# EAGLE board SparkFun_Robo_HAT-Panel (EAGLE 9.5.2), part 1 of 5
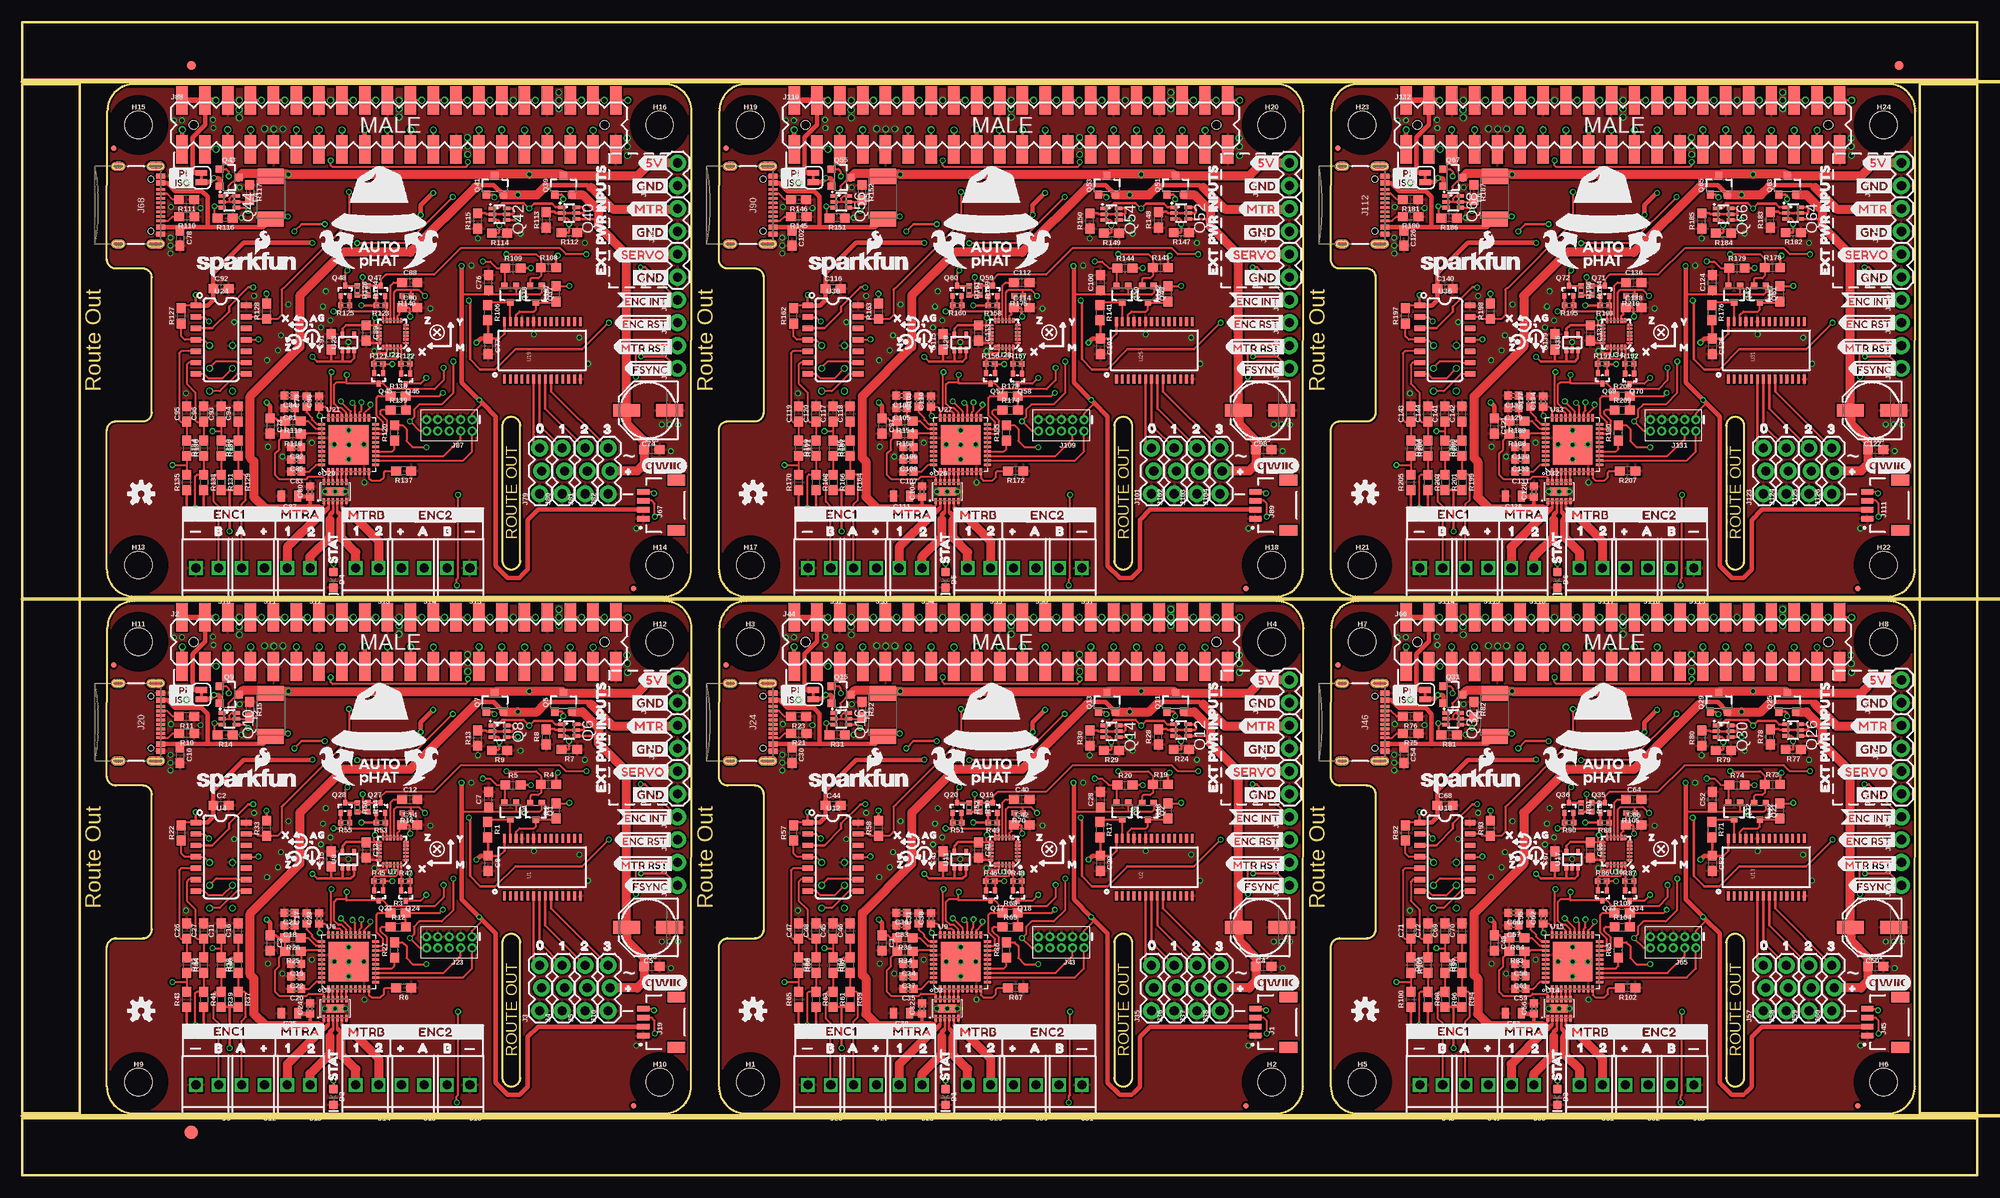
[diagram p0: board, top side]
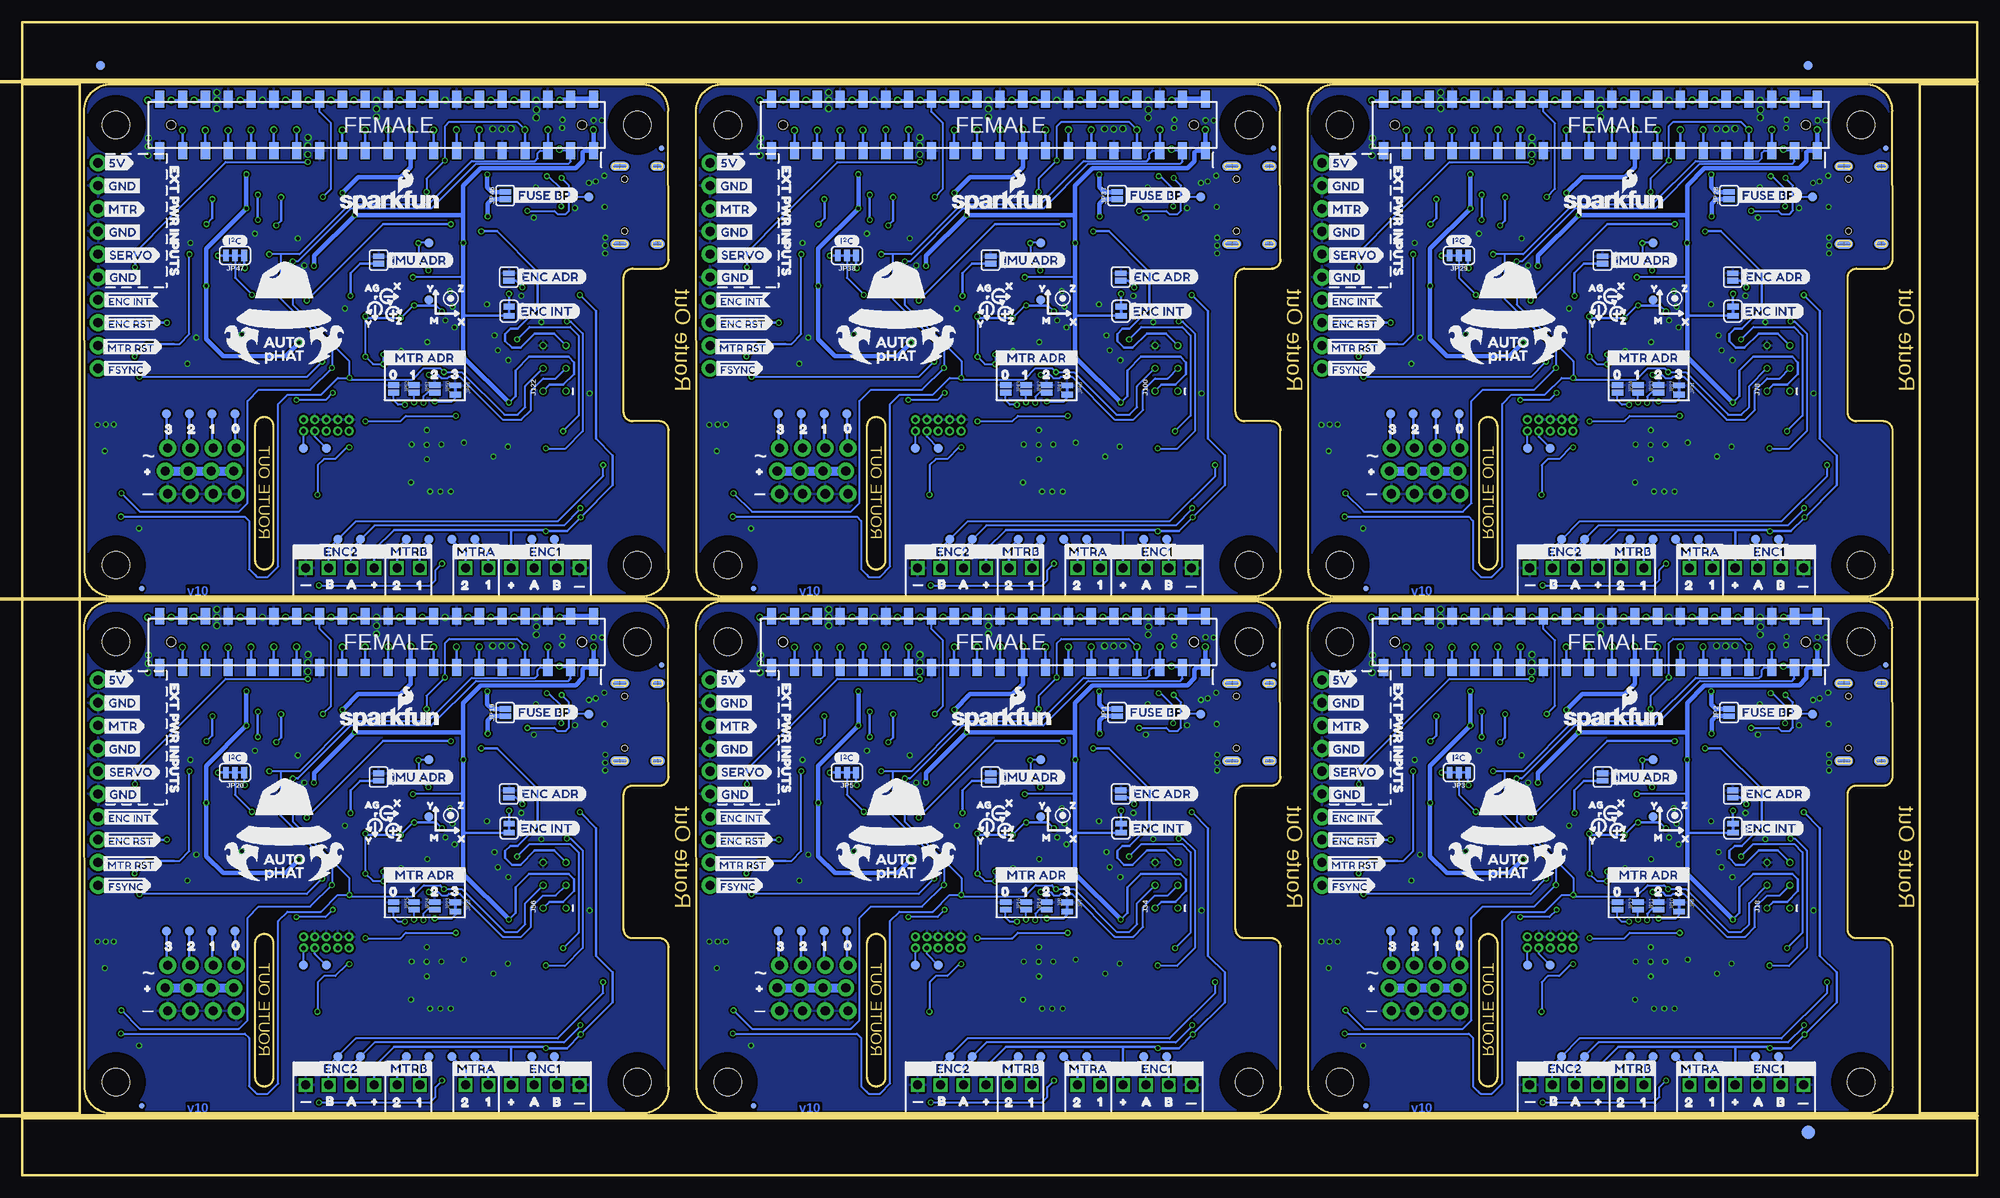
[diagram p1: board, bottom side, seen from below]

Size 217.51 x 128.29 mm. Coordinates in mm from the lower left corner, seen from the top.
Outline: 148 segments
Copper layers (1*16): Top 0.035mm / dielectric 1.5mm / Bottom 0.035mm
Design rules "SparkFun_Robo_HAT": minimum track width 4mil, minimum drill 6mil, track to track 4mil, track to pad 4mil, pad to pad 4mil, via to via 4mil, smd to smd 4mil, copper to edge 4mil, drill to drill 4mil, minimum pad ring 5mil, minimum via ring 5mil, stop-mask expansion 4mil, vias tented up to drill 25mil, thermal gap 10mil
Net classes: 1 power: width 0.508 mm
tRestrict: area 38.7,23.7 to 38.8,23.8; area 36.2,26.1 to 36.4,26.3; area 33.8,23.7 to 33.9,23.8; area 36.2,21.2 to 36.4,21.4; area 9.8,7.3 to 16,13.5; area 9.8,56.3 to 16,62.5; area 67.8,7.3 to 74,13.5; area 67.8,56.3 to 74,62.5; area 106.8,23.7 to 106.9,23.8; area 104.3,26.1 to 104.5,26.3; area 101.9,23.7 to 102,23.8; area 104.3,21.2 to 104.5,21.4; 36 more areas
bRestrict: area 9.8,7.3 to 16,13.5; area 9.8,56.3 to 16,62.5; area 67.8,7.3 to 74,13.5; area 67.8,56.3 to 74,62.5; area 77.9,7.3 to 84.1,13.5; area 77.9,56.3 to 84.1,62.5; area 135.9,7.3 to 142.1,13.5; area 135.9,56.3 to 142.1,62.5; area 146,7.3 to 152.2,13.5; area 146,56.3 to 152.2,62.5; area 204,7.3 to 210.2,13.5; area 204,56.3 to 210.2,62.5; 12 more areas
Milling: 3 lines

## Footprints (pad centres in the part's own frame; a part is rotated, then mirrored left to right if it is on the bottom)
0603 = smd 1.1 x 1: 1 -0.85,0; 2 0.85,0
PANASONIC_D = smd 3 x 1.4: + 2.4,0; - -2.4,0
0402 = smd 0.85 x 0.9: 1 -0.58,0; 2 0.58,0
0805 = smd 0.8 x 1.2: 1 -0.9,0; 2 0.9,0
LED-0603@1 = smd 1 x 1: A -0.877,0; C 0.877,0
FIDUCIAL-1X2 = smd 1 x 1: 1 0,0
FIDUCIAL-1.5X3 = smd 1.5 x 1.5: 1 0,0
1812 = smd 1.676 x 2.896: 1 -2.388,0; 2 2.388,0
FIDUCIAL-MICRO = smd 0.635 x 0.635: 1 0,0
STAND-OFF-TIGHT = hole 3.048: 0,0
SMT-JUMPER_2_NC_TRACE_SILK = smd 0.635 x 1.27: 1 -0.508,0; 2 0.508,0
JST04_1MM_RA = smd 0.6 x 1.35: 1 -1.5,0; 2 -0.5,0; 3 0.5,0; 4 1.5,0 | smd 1.2 x 2: NC1 2.8,-3.675; NC2 -2.8,-3.675
RASPBERRY_PI_HAT_40_PIN_SMD_STACKABLE_NOHOLES = smd 1.27 x 3.175: 1 0,-1.46; 2 0,4; 3 2.54,-1.46; 4 2.54,4; 5 5.08,-1.46; 6 5.08,4; 7 7.62,-1.46; 8 7.62,4; 9 10.16,-1.46; 10 10.16,4; 11 12.7,-1.46; 12 12.7,4; 13 15.24,-1.46; 14 15.24,4; 15 17.78,-1.46; 16 17.78,4; 17 20.32,-1.46; 18 20.32,4; 19 22.86,-1.46; 20 22.86,4; 21 25.4,-1.46; 22 25.4,4; 23 27.94,-1.46; 24 27.94,4; 25 30.48,-1.46; 26 30.48,4; 27 33.02,-1.46; 28 33.02,4; 29 35.56,-1.46; 30 35.56,4; 31 38.1,-1.46; 32 38.1,4; 33 40.64,-1.46; 34 40.64,4; 35 43.18,-1.46; 36 43.18,4; 37 45.72,-1.46; 38 45.72,4; 39 48.26,-1.46; 40 48.26,4 | smd 1.02 x 1.87 bottom: 1B 0,-1.587; 2B 0,4.128; 3B 2.54,-1.587; 4B 2.54,4.128; 5B 5.08,-1.587; 6B 5.08,4.128; 7B 7.62,-1.587; 8B 7.62,4.128; 9B 10.16,-1.587; 10B 10.16,4.128; 11B 12.7,-1.587; 12B 12.7,4.128; 13B 15.24,-1.587; 14B 15.24,4.128; 15B 17.78,-1.587; 16B 17.78,4.128; 17B 20.32,-1.587; 18B 20.32,4.128; 19B 22.86,-1.587; 20B 22.86,4.128; 21B 25.4,-1.587; 22B 25.4,4.128; 23B 27.94,-1.587; 24B 27.94,4.128; 25B 30.48,-1.587; 26B 30.48,4.128; 27B 33.02,-1.587; 28B 33.02,4.128; 29B 35.56,-1.587; 30B 35.56,4.128; 31B 38.1,-1.587; 32B 38.1,4.128; 33B 40.64,-1.587; 34B 40.64,4.128; 35B 43.18,-1.587; 36B 43.18,4.128; 37B 45.72,-1.587; 38B 45.72,4.128; 39B 48.26,-1.587; 40B 48.26,4.128 | hole 1: 1.27,1.27; 46.99,1.27
1X03_LOCK = drill 1.016 pad 1.88: 1 0,0.127; 2 2.54,-0.127; 3 5.08,0.127
1X01_NO_SILK = drill 1.016 pad 1.88: 1 0,0
1X02 = drill 1.016 pad 1.88: 1 0,0; 2 2.54,0
1X02_2.54_SCREWTERM = drill 1.016 square: P1 2.54,0; P2 0,0
2X3_TEST_POINTS = drill 0.508: 1 -2.54,-1.27; 2 -2.54,1.27; 3 0,-1.27; 4 0,1.27; 5 2.54,-1.27; 6 2.54,1.27
USB-C-16P = smd 0.3 x 1: A5 -1.25,-0.34; A6 -0.25,-0.34; A7 0.25,-0.34; A8 1.25,-0.34; B5 1.75,-0.34; B6 0.75,-0.34; B7 -0.75,-0.34; B8 -1.75,-0.34 | smd 0.6 x 1: GND -3.225,-0.34; GND2 3.225,-0.34; VBUS1 -2.45,-0.34; VBUS2 2.45,-0.34 | smd 1 x 2.1: SHLD1 -4.32,-0.915; SHLD2 4.32,-0.915 | smd 1 x 2.1 bottom: SHLD3 -4.32,-0.915; SHLD4 4.32,-0.915 | smd 1 x 1.6: SHLD5 -4.32,-5.095; SHLD8 4.32,-5.095 | smd 1 x 1.6 bottom: SHLD6 -4.32,-5.095; SHLD7 4.32,-5.095 | hole 0.65: -2.89,-1.445; 2.89,-1.445
2X5-PTH-1.27MM = drill 0.508 pad 1: 1 -2.54,-0.635; 2 -2.54,0.635; 3 -1.27,-0.635; 4 -1.27,0.635; 5 0,-0.635; 6 0,0.635; 7 1.27,-0.635; 8 1.27,0.635; 9 2.54,-0.635; 10 2.54,0.635
SMT-JUMPER_2_NO_SILK = smd 0.635 x 1.27: 1 -0.406,0; 2 0.406,0
SMT-JUMPER_3_2-NC_TRACE_SILK = smd 0.635 x 1.27: 1 -1.016,0; 2 0,0; 3 1.016,0
SMT-JUMPER_2_NC_TRACE_NO-SILK = smd 0.635 x 1.27: 1 -0.508,0; 2 0.508,0
SMT-JUMPER_2_NO_NO-SILK = smd 0.635 x 1.27: 1 -0.406,0; 2 0.406,0
SOT323 = smd 0.7 x 0.7: 1 -0.65,-0.925; 2 0.65,-0.925; 3 0,0.925
SOT23-3 = smd 0.8 x 0.9: 1 -0.95,-1; 2 0.95,-1; 3 0,1.1
SOT363_PHILIPS = smd 0.4 x 0.8: 1 -0.65,-0.8; 2 0,-0.8; 3 0.65,-0.8; 4 0.65,0.8; 5 0,0.8; 6 -0.65,0.8
SOT-416FL = smd 0.46 x 0.65: 1 -0.5,-1.1; 2 0.5,-1.1; 3 0,0.05
0603@1 = smd 1.1 x 1: 1 -0.85,0; 2 0.85,0
0402-TIGHT = smd 0.6 x 0.6: 1 -0.5,0; 2 0.5,0
PAD.03X.04 = smd 1.016 x 1.016: P$1 0,0
TP_15TH = drill 0.381 pad 0.61: P$1 0,0
TSSOP-28_4MM = smd 1 x 0.3: 1 -3.2,4.225; 2 -3.2,3.575; 3 -3.2,2.925; 4 -3.2,2.275; 5 -3.2,1.625; 6 -3.2,0.975; 7 -3.2,0.325; 8 -3.2,-0.325; 9 -3.2,-0.975; 10 -3.2,-1.625; 11 -3.2,-2.275; 12 -3.2,-2.925; 13 -3.2,-3.575; 14 -3.2,-4.225; 15 3.2,-4.225; 16 3.2,-3.575; 17 3.2,-2.925; 18 3.2,-2.275; 19 3.2,-1.625; 20 3.2,-0.975; 21 3.2,-0.325; 22 3.2,0.325; 23 3.2,0.975; 24 3.2,1.625; 25 3.2,2.275; 26 3.2,2.925; 27 3.2,3.575; 28 3.2,4.225
WSON-12 = smd 0.3 x 0.7: 1 -1.25,-1.05; 2 -0.75,-1.05; 3 -0.25,-1.05; 4 0.25,-1.05; 5 0.75,-1.05; 6 1.25,-1.05; 7 1.25,1.05; 8 0.75,1.05; 9 0.25,1.05; 10 -0.25,1.05; 11 -0.75,1.05; 12 -1.25,1.05 | smd 2 x 0.9: PAD 0,0
SO14 = smd 0.6 x 1.2: 1 -3.175,-2.8; 2 -1.905,-2.8; 3 -0.635,-2.8; 4 0.635,-2.8; 5 1.905,-2.8; 6 3.175,-2.8; 7 4.445,-2.8; 8 4.445,2.8; 9 3.175,2.8; 10 1.905,2.8; 11 0.635,2.8; 12 -0.635,2.8; 13 -1.905,2.8; 14 -3.175,2.8
QFN-40 = smd 0.285 x 0.8: 1 -2.25,-3; 2 -1.75,-3; 3 -1.25,-3; 4 -0.75,-3; 5 -0.25,-3; 6 0.25,-3; 7 0.75,-3; 8 1.25,-3; 9 1.75,-3; 10 2.25,-3; 21 2.25,3; 22 1.75,3; 23 1.25,3; 24 0.75,3; 25 0.25,3; 26 -0.25,3; 27 -0.75,3; 28 -1.25,3; 29 -1.75,3; 30 -2.25,3 | smd 0.8 x 0.285: 11 3,-2.25; 12 3,-1.75; 13 3,-1.25; 14 3,-0.75; 15 3,-0.25; 16 3,0.25; 17 3,0.75; 18 3,1.25; 19 3,1.75; 20 3,2.25; 31 -3,2.25; 32 -3,1.75; 33 -3,1.25; 34 -3,0.75; 35 -3,0.25; 36 -3,-0.25; 37 -3,-0.75; 38 -3,-1.25; 39 -3,-1.75; 40 -3,-2.25 | smd 4.4 x 4.4: EP 0,0
QFN24-3X3 = smd 0.495 x 0.25: 1 -1.552,1; 6 -1.552,-1; 13 1.552,-1; 18 1.552,1 | smd 0.6 x 0.25: 2 -1.5,0.6; 3 -1.5,0.2; 4 -1.5,-0.2; 5 -1.5,-0.6; 14 1.5,-0.6; 15 1.5,-0.2; 16 1.5,0.2; 17 1.5,0.6 | smd 0.25 x 0.495: 7 -1,-1.552; 12 1,-1.552; 19 1,1.552; 24 -1,1.552 | smd 0.25 x 0.6: 8 -0.6,-1.5; 9 -0.2,-1.5; 10 0.2,-1.5; 11 0.6,-1.5; 20 0.6,1.5; 21 0.2,1.5; 22 -0.2,1.5; 23 -0.6,1.5
SC70 = smd 0.4 x 0.75: 1 -0.65,-0.825; 2 0,-0.825; 3 0.65,-0.825; 4 0.65,0.825; 5 -0.65,0.825

## Placement (x,y rotation side)
C1  0.1uF  [0603]  95.67,25.84 270 top
C2  0.1uF  [0603]  22.1,41.15 0 top
C3  0.1uF  [0603]  27.57,25.84 270 top
C4  100uF  [PANASONIC_D]  137.73,27.58 180 top
C5  100uF  [PANASONIC_D]  69.63,27.58 180 top
C6  0.1uF  [0603]  70.03,23.23 0 top
C7  0.1uF  [0603]  51.86,41.78 90 top
C8  0.1uF  [0603]  51.84,34.7 270 top
C9  0.1uF  [0603]  138.13,23.23 0 top
C10  0.1uF  [0603]  17.53,46.74 270 top
C11  10nF  [0603]  22.1,27.18 90 top
C12  0.1uF  [0603]  43.1,41.82 0 top
C13  0.1uF  [0603]  38.27,36.19 270 top
C14  1.0uF  [0603]  43.09,39 0 top
C15  1.0uF  [0603]  34.34,35.19 90 top
C16  10nF  [0603]  24,27.18 90 top
C17  1.0uF  [0402]  31.62,28.57 90 top
C18  1.0uF  [0402]  29.72,27.81 180 top
C19  1.0uF  [0402]  30.48,23.5 180 top
C20  1.0uF  [0402]  30.48,20.75 180 top
C21  0.1uF  [0402]  29.72,29.21 180 top
C22  0.1uF  [0402]  30.48,22.12 180 top
C23  0.1uF  [0402]  33.02,28.57 90 top
C24  0.1uF  [0402]  32,18.54 90 top
C25  10uF  [0805]  29.72,18.03 180 top
C26  10nF  [0603]  18.29,27.18 90 top
C27  10nF  [0603]  20.19,27.18 90 top
C28  0.1uF  [0603]  119.96,41.78 90 top
C29  0.1uF  [0603]  119.94,34.7 270 top
C30  0.1uF  [0603]  85.63,46.74 270 top
C31  1.0uF  [0402]  99.72,28.57 90 top
C32  0.1uF  [0402]  100.1,18.54 90 top
C33  1.0uF  [0402]  97.82,27.81 180 top
C34  1.0uF  [0402]  98.58,23.5 180 top
C35  1.0uF  [0402]  98.58,20.75 180 top
C36  0.1uF  [0402]  97.82,29.21 180 top
C37  0.1uF  [0402]  98.58,22.12 180 top
C38  0.1uF  [0402]  101.12,28.57 90 top
C39  10uF  [0805]  97.82,18.03 180 top
C40  0.1uF  [0603]  111.2,41.82 0 top
C41  0.1uF  [0603]  106.37,36.19 270 top
C42  1.0uF  [0603]  111.19,39 0 top
C43  1.0uF  [0603]  102.44,35.19 90 top
C44  0.1uF  [0603]  90.2,41.15 0 top
C45  10nF  [0603]  90.2,27.18 90 top
C46  10nF  [0603]  92.1,27.18 90 top
C47  10nF  [0603]  86.39,27.18 90 top
C48  10nF  [0603]  88.29,27.18 90 top
C49  0.1uF  [0603]  163.77,25.84 270 top
C50  100uF  [PANASONIC_D]  205.82,27.58 180 top
C51  0.1uF  [0603]  206.23,23.23 0 top
C52  0.1uF  [0603]  188.06,41.78 90 top
C53  0.1uF  [0603]  188.04,34.7 270 top
C54  0.1uF  [0603]  153.72,46.74 270 top
C55  1.0uF  [0402]  167.82,28.57 90 top
C56  0.1uF  [0402]  168.2,18.54 90 top
C57  1.0uF  [0402]  165.92,27.81 180 top
C58  1.0uF  [0402]  166.68,23.5 180 top
C59  1.0uF  [0402]  166.68,20.75 180 top
C60  0.1uF  [0402]  165.92,29.21 180 top
C61  0.1uF  [0402]  166.68,22.12 180 top
C62  0.1uF  [0402]  169.22,28.57 90 top
C63  10uF  [0805]  165.92,18.03 180 top
C64  0.1uF  [0603]  179.3,41.82 0 top
C65  0.1uF  [0603]  174.46,36.19 270 top
C66  1.0uF  [0603]  179.29,39 0 top
C67  1.0uF  [0603]  170.54,35.19 90 top
C68  0.1uF  [0603]  158.3,41.15 0 top
C69  10nF  [0603]  158.3,27.18 90 top
C70  10nF  [0603]  160.2,27.18 90 top
C71  10nF  [0603]  154.49,27.18 90 top
C72  10nF  [0603]  156.39,27.18 90 top
C73  0.1uF  [0603]  27.57,83.38 270 top
C74  100uF  [PANASONIC_D]  69.63,85.12 180 top
C75  0.1uF  [0603]  70.03,80.77 0 top
C76  0.1uF  [0603]  51.86,99.32 90 top
C77  0.1uF  [0603]  51.84,92.25 270 top
C78  0.1uF  [0603]  17.53,104.28 270 top
C79  1.0uF  [0402]  31.62,86.12 90 top
C80  0.1uF  [0402]  32,76.08 90 top
C81  1.0uF  [0402]  29.72,85.35 180 top
C82  1.0uF  [0402]  30.48,81.04 180 top
C83  1.0uF  [0402]  30.48,78.29 180 top
C84  0.1uF  [0402]  29.72,86.75 180 top
C85  0.1uF  [0402]  30.48,79.66 180 top
C86  0.1uF  [0402]  33.02,86.12 90 top
C87  10uF  [0805]  29.72,75.58 180 top
C88  0.1uF  [0603]  43.1,99.36 0 top
C89  0.1uF  [0603]  38.27,93.73 270 top
C90  1.0uF  [0603]  43.09,96.54 0 top
C91  1.0uF  [0603]  34.34,92.74 90 top
C92  0.1uF  [0603]  22.1,98.69 0 top
C93  10nF  [0603]  22.1,84.72 90 top
C94  10nF  [0603]  24,84.72 90 top
C95  10nF  [0603]  18.29,84.72 90 top
C96  10nF  [0603]  20.19,84.72 90 top
C97  0.1uF  [0603]  95.67,83.38 270 top
C98  100uF  [PANASONIC_D]  137.73,85.12 180 top
C99  0.1uF  [0603]  138.13,80.77 0 top
C100  0.1uF  [0603]  119.96,99.32 90 top
C101  0.1uF  [0603]  119.94,92.25 270 top
C102  0.1uF  [0603]  85.63,104.28 270 top
C103  1.0uF  [0402]  99.72,86.12 90 top
C104  0.1uF  [0402]  100.1,76.08 90 top
C105  1.0uF  [0402]  97.82,85.35 180 top
C106  1.0uF  [0402]  98.58,81.04 180 top
C107  1.0uF  [0402]  98.58,78.29 180 top
C108  0.1uF  [0402]  97.82,86.75 180 top
C109  0.1uF  [0402]  98.58,79.66 180 top
C110  0.1uF  [0402]  101.12,86.12 90 top
C111  10uF  [0805]  97.82,75.58 180 top
C112  0.1uF  [0603]  111.2,99.36 0 top
C113  0.1uF  [0603]  106.37,93.73 270 top
C114  1.0uF  [0603]  111.19,96.54 0 top
C115  1.0uF  [0603]  102.44,92.74 90 top
C116  0.1uF  [0603]  90.2,98.69 0 top
C117  10nF  [0603]  90.2,84.72 90 top
C118  10nF  [0603]  92.1,84.72 90 top
C119  10nF  [0603]  86.39,84.72 90 top
C120  10nF  [0603]  88.29,84.72 90 top
C121  0.1uF  [0603]  163.77,83.38 270 top
C122  100uF  [PANASONIC_D]  205.82,85.12 180 top
C123  0.1uF  [0603]  206.23,80.77 0 top
C124  0.1uF  [0603]  188.06,99.32 90 top
C125  0.1uF  [0603]  188.04,92.25 270 top
C126  0.1uF  [0603]  153.72,104.28 270 top
C127  1.0uF  [0402]  167.82,86.12 90 top
C128  0.1uF  [0402]  168.2,76.08 90 top
C129  1.0uF  [0402]  165.92,85.35 180 top
C130  1.0uF  [0402]  166.68,81.04 180 top
C131  1.0uF  [0402]  166.68,78.29 180 top
C132  0.1uF  [0402]  165.92,86.75 180 top
C133  0.1uF  [0402]  166.68,79.66 180 top
C134  0.1uF  [0402]  169.22,86.12 90 top
C135  10uF  [0805]  165.92,75.58 180 top
C136  0.1uF  [0603]  179.3,99.36 0 top
C137  0.1uF  [0603]  174.46,93.73 270 top
C138  1.0uF  [0603]  179.29,96.54 0 top
C139  1.0uF  [0603]  170.54,92.74 90 top
C140  0.1uF  [0603]  158.3,98.69 0 top
C141  10nF  [0603]  158.3,84.72 90 top
C142  10nF  [0603]  160.2,84.72 90 top
C143  10nF  [0603]  154.49,84.72 90 top
C144  10nF  [0603]  156.39,84.72 90 top
D1  BLUE  [LED-0603@1]  102.72,8.71 270 top
D2  BLUE  [LED-0603@1]  34.62,8.71 270 top
D3  BLUE  [LED-0603@1]  170.81,8.71 270 top
D4  BLUE  [LED-0603@1]  34.62,66.25 270 top
D5  BLUE  [LED-0603@1]  102.72,66.25 270 top
D6  BLUE  [LED-0603@1]  170.81,66.25 270 top
E$1  [FIDUCIAL-1X2]  18.8,123.53 0 top
E$2  [FIDUCIAL-1X2]  18.8,123.53 0 bottom
E$3  [FIDUCIAL-1X2]  208.81,123.53 0 top
E$4  [FIDUCIAL-1X2]  208.81,123.53 0 bottom
E$5  [FIDUCIAL-1.5X3]  18.8,4.76 0 top
E$6  [FIDUCIAL-1.5X3]  18.8,4.76 0 bottom
F1  16V/2.5A(5A TRIP)  [1812]  95.74,51.22 90 top
F2  16V/2.5A(5A TRIP)  [1812]  27.64,51.22 90 top
F3  16V/2.5A(5A TRIP)  [1812]  163.84,51.22 90 top
F4  16V/2.5A(5A TRIP)  [1812]  27.64,108.77 90 top
F5  16V/2.5A(5A TRIP)  [1812]  95.74,108.77 90 top
F6  16V/2.5A(5A TRIP)  [1812]  163.84,108.77 90 top
FD1  FIDUCIALUFIDUCIAL  [FIDUCIAL-MICRO]  136.13,7.74 0 top
FD2  FIDUCIALUFIDUCIAL  [FIDUCIAL-MICRO]  136.13,7.74 0 bottom
FD3  FIDUCIALUFIDUCIAL  [FIDUCIAL-MICRO]  78.27,56.77 0 top
FD4  FIDUCIALUFIDUCIAL  [FIDUCIAL-MICRO]  78.27,56.77 0 bottom
FD5  FIDUCIALUFIDUCIAL  [FIDUCIAL-MICRO]  68.03,7.74 0 top
FD6  FIDUCIALUFIDUCIAL  [FIDUCIAL-MICRO]  68.03,7.74 0 bottom
FD7  FIDUCIALUFIDUCIAL  [FIDUCIAL-MICRO]  10.17,56.77 0 top
FD8  FIDUCIALUFIDUCIAL  [FIDUCIAL-MICRO]  10.17,56.77 0 bottom
FD9  FIDUCIALUFIDUCIAL  [FIDUCIAL-MICRO]  204.23,7.74 0 top
FD10  FIDUCIALUFIDUCIAL  [FIDUCIAL-MICRO]  204.23,7.74 0 bottom
FD11  FIDUCIALUFIDUCIAL  [FIDUCIAL-MICRO]  146.37,56.77 0 top
FD12  FIDUCIALUFIDUCIAL  [FIDUCIAL-MICRO]  146.37,56.77 0 bottom
FD13  FIDUCIALUFIDUCIAL  [FIDUCIAL-MICRO]  68.03,65.28 0 top
FD14  FIDUCIALUFIDUCIAL  [FIDUCIAL-MICRO]  68.03,65.28 0 bottom
FD15  FIDUCIALUFIDUCIAL  [FIDUCIAL-MICRO]  10.17,114.31 0 top
FD16  FIDUCIALUFIDUCIAL  [FIDUCIAL-MICRO]  10.17,114.31 0 bottom
FD17  FIDUCIALUFIDUCIAL  [FIDUCIAL-MICRO]  136.13,65.28 0 top
FD18  FIDUCIALUFIDUCIAL  [FIDUCIAL-MICRO]  136.13,65.28 0 bottom
FD19  FIDUCIALUFIDUCIAL  [FIDUCIAL-MICRO]  78.27,114.31 0 top
FD20  FIDUCIALUFIDUCIAL  [FIDUCIAL-MICRO]  78.27,114.31 0 bottom
FD21  FIDUCIALUFIDUCIAL  [FIDUCIAL-MICRO]  204.23,65.28 0 top
FD22  FIDUCIALUFIDUCIAL  [FIDUCIAL-MICRO]  204.23,65.28 0 bottom
FD23  FIDUCIALUFIDUCIAL  [FIDUCIAL-MICRO]  146.37,114.31 0 top
FD24  FIDUCIALUFIDUCIAL  [FIDUCIAL-MICRO]  146.37,114.31 0 bottom
FRAME1  FRAME-LETTERNO_PACKAGE  [DUMMY]  36.07,-13.46 0 top  (outside the outline)
FRAME2  FRAME-LEDGER  [CREATIVE_COMMONS]  33.53,-13.46 0 top  (outside the outline)
FRAME3  FRAME-LEDGER  [CREATIVE_COMMONS]  33.53,-13.46 0 top  (outside the outline)
FRAME4  FRAME-LEDGER  [CREATIVE_COMMONS]  101.63,-13.46 0 top  (outside the outline)
FRAME5  FRAME-LETTERNO_PACKAGE  [DUMMY]  104.17,-13.46 0 top  (outside the outline)
FRAME6  FRAME-LEDGER  [CREATIVE_COMMONS]  101.63,-13.46 0 top  (outside the outline)
FRAME7  FRAME-LEDGER  [CREATIVE_COMMONS]  169.73,-13.46 0 top  (outside the outline)
FRAME8  FRAME-LETTERNO_PACKAGE  [DUMMY]  172.27,-13.46 0 top  (outside the outline)
FRAME9  FRAME-LEDGER  [CREATIVE_COMMONS]  169.73,-13.46 0 top  (outside the outline)
FRAME10  FRAME-LEDGER  [CREATIVE_COMMONS]  33.53,44.08 0 top
FRAME11  FRAME-LETTERNO_PACKAGE  [DUMMY]  36.07,44.08 0 top
FRAME12  FRAME-LEDGER  [CREATIVE_COMMONS]  33.53,44.08 0 top
FRAME13  FRAME-LEDGER  [CREATIVE_COMMONS]  101.63,44.08 0 top
FRAME14  FRAME-LETTERNO_PACKAGE  [DUMMY]  104.17,44.08 0 top
FRAME15  FRAME-LEDGER  [CREATIVE_COMMONS]  101.63,44.08 0 top
FRAME16  FRAME-LEDGER  [CREATIVE_COMMONS]  169.73,44.08 0 top
FRAME17  FRAME-LETTERNO_PACKAGE  [DUMMY]  172.27,44.08 0 top
FRAME18  FRAME-LEDGER  [CREATIVE_COMMONS]  169.73,44.08 0 top
H1  STAND-OFFTIGHT  [STAND-OFF-TIGHT]  81,10.36 0 top
H2  STAND-OFFTIGHT  [STAND-OFF-TIGHT]  139,10.36 0 top
H3  STAND-OFFTIGHT  [STAND-OFF-TIGHT]  81,59.36 0 top
H4  STAND-OFFTIGHT  [STAND-OFF-TIGHT]  139,59.36 0 top
H5  STAND-OFFTIGHT  [STAND-OFF-TIGHT]  149.1,10.36 0 top
H6  STAND-OFFTIGHT  [STAND-OFF-TIGHT]  207.1,10.36 0 top
H7  STAND-OFFTIGHT  [STAND-OFF-TIGHT]  149.1,59.36 0 top
H8  STAND-OFFTIGHT  [STAND-OFF-TIGHT]  207.1,59.36 0 top
H9  STAND-OFFTIGHT  [STAND-OFF-TIGHT]  12.9,10.36 0 top
H10  STAND-OFFTIGHT  [STAND-OFF-TIGHT]  70.9,10.36 0 top
H11  STAND-OFFTIGHT  [STAND-OFF-TIGHT]  12.9,59.36 0 top
H12  STAND-OFFTIGHT  [STAND-OFF-TIGHT]  70.9,59.36 0 top
H13  STAND-OFFTIGHT  [STAND-OFF-TIGHT]  12.9,67.9 0 top
H14  STAND-OFFTIGHT  [STAND-OFF-TIGHT]  70.9,67.9 0 top
H15  STAND-OFFTIGHT  [STAND-OFF-TIGHT]  12.9,116.9 0 top
H16  STAND-OFFTIGHT  [STAND-OFF-TIGHT]  70.9,116.9 0 top
H17  STAND-OFFTIGHT  [STAND-OFF-TIGHT]  81,67.9 0 top
H18  STAND-OFFTIGHT  [STAND-OFF-TIGHT]  139,67.9 0 top
H19  STAND-OFFTIGHT  [STAND-OFF-TIGHT]  81,116.9 0 top
H20  STAND-OFFTIGHT  [STAND-OFF-TIGHT]  139,116.9 0 top
H21  STAND-OFFTIGHT  [STAND-OFF-TIGHT]  149.1,67.9 0 top
H22  STAND-OFFTIGHT  [STAND-OFF-TIGHT]  207.1,67.9 0 top
H23  STAND-OFFTIGHT  [STAND-OFF-TIGHT]  149.1,116.9 0 top
H24  STAND-OFFTIGHT  [STAND-OFF-TIGHT]  207.1,116.9 0 top
INT  [SMT-JUMPER_2_NC_TRACE_SILK]  27.15,38.61 270 bottom
INT1  [SMT-JUMPER_2_NC_TRACE_SILK]  95.25,38.61 270 bottom
INT2  [SMT-JUMPER_2_NC_TRACE_SILK]  163.35,38.61 270 bottom
INT3  [SMT-JUMPER_2_NC_TRACE_SILK]  27.15,96.15 270 bottom
INT4  [SMT-JUMPER_2_NC_TRACE_SILK]  95.25,96.15 270 bottom
INT5  [SMT-JUMPER_2_NC_TRACE_SILK]  163.35,96.15 270 bottom
J1  [JST04_1MM_RA]  137.19,17.02 90 top
J2  RASPBERRYPI-40-PIN-GPIO_SMD_STACKABLE_NOHOLES  [RASPBERRY_PI_HAT_40_PIN_SMD_STACKABLE_NOHOLES]  17.77,58.07 0 top
J3  [1X03_LOCK]  57.66,18.29 90 top
J4  [1X03_LOCK]  60.2,18.29 90 top
J5  [1X03_LOCK]  62.74,18.29 90 top
J6  [1X01_NO_SILK]  72.9,39.88 90 top
J7  EXT SERVO PWR  [1X02]  72.9,42.42 90 top
J8  EXT 5V PWR  [1X02]  72.9,52.58 90 top
J9  [1X02_2.54_SCREWTERM]  21.84,10.03 180 top
J10  [1X03_LOCK]  65.28,18.29 90 top
J11  EXT MTR PWR  [1X02]  72.9,47.5 90 top
J12  [1X02_2.54_SCREWTERM]  26.92,10.03 180 top
J13  [1X02_2.54_SCREWTERM]  32,10.03 180 top
J14  [1X02_2.54_SCREWTERM]  39.62,10.03 180 top
J15  [1X02_2.54_SCREWTERM]  44.7,10.03 180 top
J16  [1X02_2.54_SCREWTERM]  49.78,10.03 180 top
J17  [1X01_NO_SILK]  72.9,37.34 90 top
J18  ISP  [2X3_TEST_POINTS]  22.1,32.26 90 bottom
J19  [JST04_1MM_RA]  69.09,17.02 90 top
J20  USB C  [USB-C-16P]  15.75,50.42 270 top
J21  [1X01_NO_SILK]  72.9,32.26 90 top
J22  [1X01_NO_SILK]  72.9,34.8 90 top
J23  CORTEX_JTAG_DEBUG_PTH  [2X5-PTH-1.27MM]  47.5,25.91 180 top
J24  USB C  [USB-C-16P]  83.85,50.42 270 top
J25  EXT MTR PWR  [1X02]  141,47.5 90 top
J26  [1X02_2.54_SCREWTERM]  89.94,10.03 180 top
J27  [1X02_2.54_SCREWTERM]  95.02,10.03 180 top
J28  [1X02_2.54_SCREWTERM]  100.1,10.03 180 top
J29  [1X02_2.54_SCREWTERM]  107.72,10.03 180 top
J30  [1X02_2.54_SCREWTERM]  112.8,10.03 180 top
J31  [1X02_2.54_SCREWTERM]  117.88,10.03 180 top
J32  [1X01_NO_SILK]  141,39.88 90 top
J33  [1X01_NO_SILK]  141,37.34 90 top
J34  ISP  [2X3_TEST_POINTS]  90.2,32.26 90 bottom
J35  [1X03_LOCK]  125.76,18.29 90 top
J36  [1X03_LOCK]  128.3,18.29 90 top
J37  [1X03_LOCK]  130.84,18.29 90 top
J38  [1X03_LOCK]  133.38,18.29 90 top
J39  EXT SERVO PWR  [1X02]  141,42.42 90 top
J40  EXT 5V PWR  [1X02]  141,52.58 90 top
J41  [1X01_NO_SILK]  141,32.26 90 top
J42  [1X01_NO_SILK]  141,34.8 90 top
J43  CORTEX_JTAG_DEBUG_PTH  [2X5-PTH-1.27MM]  115.6,25.91 180 top
J44  RASPBERRYPI-40-PIN-GPIO_SMD_STACKABLE_NOHOLES  [RASPBERRY_PI_HAT_40_PIN_SMD_STACKABLE_NOHOLES]  85.87,58.07 0 top
J45  [JST04_1MM_RA]  205.29,17.02 90 top
J46  USB C  [USB-C-16P]  151.95,50.42 270 top
J47  EXT MTR PWR  [1X02]  209.1,47.5 90 top
J48  [1X02_2.54_SCREWTERM]  158.04,10.03 180 top
J49  [1X02_2.54_SCREWTERM]  163.12,10.03 180 top
J50  [1X02_2.54_SCREWTERM]  168.2,10.03 180 top
J51  [1X02_2.54_SCREWTERM]  175.82,10.03 180 top
J52  [1X02_2.54_SCREWTERM]  180.9,10.03 180 top
J53  [1X02_2.54_SCREWTERM]  185.98,10.03 180 top
J54  [1X01_NO_SILK]  209.1,39.88 90 top
J55  [1X01_NO_SILK]  209.1,37.34 90 top
J56  ISP  [2X3_TEST_POINTS]  158.3,32.26 90 bottom
J57  [1X03_LOCK]  193.86,18.29 90 top
J58  [1X03_LOCK]  196.4,18.29 90 top
J59  [1X03_LOCK]  198.94,18.29 90 top
J60  [1X03_LOCK]  201.48,18.29 90 top
J61  EXT SERVO PWR  [1X02]  209.1,42.42 90 top
J62  EXT 5V PWR  [1X02]  209.1,52.58 90 top
J63  [1X01_NO_SILK]  209.1,32.26 90 top
J64  [1X01_NO_SILK]  209.1,34.8 90 top
J65  CORTEX_JTAG_DEBUG_PTH  [2X5-PTH-1.27MM]  183.7,25.91 180 top
J66  RASPBERRYPI-40-PIN-GPIO_SMD_STACKABLE_NOHOLES  [RASPBERRY_PI_HAT_40_PIN_SMD_STACKABLE_NOHOLES]  153.97,58.07 0 top
J67  [JST04_1MM_RA]  69.09,74.56 90 top
J68  USB C  [USB-C-16P]  15.75,107.96 270 top
J69  EXT MTR PWR  [1X02]  72.9,105.04 90 top
J70  [1X02_2.54_SCREWTERM]  21.84,67.57 180 top
J71  [1X02_2.54_SCREWTERM]  26.92,67.57 180 top
J72  [1X02_2.54_SCREWTERM]  32,67.57 180 top
J73  [1X02_2.54_SCREWTERM]  39.62,67.57 180 top
J74  [1X02_2.54_SCREWTERM]  44.7,67.57 180 top
J75  [1X02_2.54_SCREWTERM]  49.78,67.57 180 top
J76  [1X01_NO_SILK]  72.9,97.42 90 top
J77  [1X01_NO_SILK]  72.9,94.88 90 top
J78  ISP  [2X3_TEST_POINTS]  22.1,89.8 90 bottom
J79  [1X03_LOCK]  57.66,75.83 90 top
J80  [1X03_LOCK]  60.2,75.83 90 top
J81  [1X03_LOCK]  62.74,75.83 90 top
J82  [1X03_LOCK]  65.28,75.83 90 top
J83  EXT SERVO PWR  [1X02]  72.9,99.96 90 top
J84  EXT 5V PWR  [1X02]  72.9,110.12 90 top
J85  [1X01_NO_SILK]  72.9,89.8 90 top
J86  [1X01_NO_SILK]  72.9,92.34 90 top
J87  CORTEX_JTAG_DEBUG_PTH  [2X5-PTH-1.27MM]  47.5,83.45 180 top
J88  RASPBERRYPI-40-PIN-GPIO_SMD_STACKABLE_NOHOLES  [RASPBERRY_PI_HAT_40_PIN_SMD_STACKABLE_NOHOLES]  17.77,115.62 0 top
J89  [JST04_1MM_RA]  137.19,74.56 90 top
J90  USB C  [USB-C-16P]  83.85,107.96 270 top
J91  EXT MTR PWR  [1X02]  141,105.04 90 top
J92  [1X02_2.54_SCREWTERM]  89.94,67.57 180 top
J93  [1X02_2.54_SCREWTERM]  95.02,67.57 180 top
J94  [1X02_2.54_SCREWTERM]  100.1,67.57 180 top
J95  [1X02_2.54_SCREWTERM]  107.72,67.57 180 top
J96  [1X02_2.54_SCREWTERM]  112.8,67.57 180 top
J97  [1X02_2.54_SCREWTERM]  117.88,67.57 180 top
J98  [1X01_NO_SILK]  141,97.42 90 top
J99  [1X01_NO_SILK]  141,94.88 90 top
J100  ISP  [2X3_TEST_POINTS]  90.2,89.8 90 bottom
J101  [1X03_LOCK]  125.76,75.83 90 top
J102  [1X03_LOCK]  128.3,75.83 90 top
J103  [1X03_LOCK]  130.84,75.83 90 top
J104  [1X03_LOCK]  133.38,75.83 90 top
J105  EXT SERVO PWR  [1X02]  141,99.96 90 top
J106  EXT 5V PWR  [1X02]  141,110.12 90 top
J107  [1X01_NO_SILK]  141,89.8 90 top
J108  [1X01_NO_SILK]  141,92.34 90 top
J109  CORTEX_JTAG_DEBUG_PTH  [2X5-PTH-1.27MM]  115.6,83.45 180 top
J110  RASPBERRYPI-40-PIN-GPIO_SMD_STACKABLE_NOHOLES  [RASPBERRY_PI_HAT_40_PIN_SMD_STACKABLE_NOHOLES]  85.87,115.62 0 top
J111  [JST04_1MM_RA]  205.29,74.56 90 top
J112  USB C  [USB-C-16P]  151.95,107.96 270 top
J113  EXT MTR PWR  [1X02]  209.1,105.04 90 top
J114  [1X02_2.54_SCREWTERM]  158.04,67.57 180 top
J115  [1X02_2.54_SCREWTERM]  163.12,67.57 180 top
J116  [1X02_2.54_SCREWTERM]  168.2,67.57 180 top
J117  [1X02_2.54_SCREWTERM]  175.82,67.57 180 top
J118  [1X02_2.54_SCREWTERM]  180.9,67.57 180 top
J119  [1X02_2.54_SCREWTERM]  185.98,67.57 180 top
J120  [1X01_NO_SILK]  209.1,97.42 90 top
J121  [1X01_NO_SILK]  209.1,94.88 90 top
J122  ISP  [2X3_TEST_POINTS]  158.3,89.8 90 bottom
J123  [1X03_LOCK]  193.86,75.83 90 top
J124  [1X03_LOCK]  196.4,75.83 90 top
J125  [1X03_LOCK]  198.94,75.83 90 top
J126  [1X03_LOCK]  201.48,75.83 90 top
J127  EXT SERVO PWR  [1X02]  209.1,99.96 90 top
J128  EXT 5V PWR  [1X02]  209.1,110.12 90 top
J129  [1X01_NO_SILK]  209.1,89.8 90 top
J130  [1X01_NO_SILK]  209.1,92.34 90 top
J131  CORTEX_JTAG_DEBUG_PTH  [2X5-PTH-1.27MM]  183.7,83.45 180 top
J132  RASPBERRYPI-40-PIN-GPIO_SMD_STACKABLE_NOHOLES  [RASPBERRY_PI_HAT_40_PIN_SMD_STACKABLE_NOHOLES]  153.97,115.62 0 top
JP1  FUSE BP  [SMT-JUMPER_2_NO_SILK]  95.69,51.48 90 bottom
JP2  FUSE BP  [SMT-JUMPER_2_NO_SILK]  27.59,51.48 90 bottom
JP3  I2C  [SMT-JUMPER_3_2-NC_TRACE_SILK]  57.66,44.81 180 bottom
JP4  PI ISO  [SMT-JUMPER_2_NC_TRACE_SILK]  19.9,53.48 90 top
JP5  I2C  [SMT-JUMPER_3_2-NC_TRACE_SILK]  125.76,44.81 180 bottom
JP6  PI ISO  [SMT-JUMPER_2_NC_TRACE_SILK]  88,53.48 90 top
JP7  JUMPER-PAD-2  [SMT-JUMPER_2_NC_TRACE_NO-SILK]  101.25,29.84 270 bottom
JP8  JUMPER-PAD-2  [SMT-JUMPER_2_NO_NO-SILK]  103.53,29.97 270 bottom
JP9  JUMPER-PAD-2  [SMT-JUMPER_2_NC_TRACE_NO-SILK]  33.15,29.84 270 bottom
JP10  JUMPER-PAD-2  [SMT-JUMPER_2_NO_NO-SILK]  35.43,29.97 270 bottom
JP11  JUMPER-PAD-2  [SMT-JUMPER_2_NO_NO-SILK]  37.72,29.97 270 bottom
JP12  JUMPER-PAD-2  [SMT-JUMPER_2_NO_NO-SILK]  40,29.97 270 bottom
JP13  ADR  [SMT-JUMPER_2_NO_SILK]  27.18,42.42 270 bottom
JP14  JUMPER-PAD-2  [SMT-JUMPER_2_NO_NO-SILK]  105.82,29.97 270 bottom
JP15  ADR  [SMT-JUMPER_2_NO_SILK]  41.67,44.3 270 bottom
JP16  JUMPER-PAD-2  [SMT-JUMPER_2_NO_NO-SILK]  108.1,29.97 270 bottom
JP17  ADR  [SMT-JUMPER_2_NO_SILK]  109.77,44.3 270 bottom
JP18  ADR  [SMT-JUMPER_2_NO_SILK]  95.28,42.42 270 bottom
JP19  FUSE BP  [SMT-JUMPER_2_NO_SILK]  163.79,51.48 90 bottom
JP20  I2C  [SMT-JUMPER_3_2-NC_TRACE_SILK]  193.86,44.81 180 bottom
JP21  PI ISO  [SMT-JUMPER_2_NC_TRACE_SILK]  156.1,53.48 90 top
JP22  JUMPER-PAD-2  [SMT-JUMPER_2_NC_TRACE_NO-SILK]  169.34,29.84 270 bottom
JP23  JUMPER-PAD-2  [SMT-JUMPER_2_NO_NO-SILK]  171.63,29.97 270 bottom
JP24  JUMPER-PAD-2  [SMT-JUMPER_2_NO_NO-SILK]  173.92,29.97 270 bottom
JP25  JUMPER-PAD-2  [SMT-JUMPER_2_NO_NO-SILK]  176.2,29.97 270 bottom
JP26  ADR  [SMT-JUMPER_2_NO_SILK]  177.87,44.3 270 bottom
JP27  ADR  [SMT-JUMPER_2_NO_SILK]  163.38,42.42 270 bottom
JP28  FUSE BP  [SMT-JUMPER_2_NO_SILK]  27.59,109.02 90 bottom
JP29  I2C  [SMT-JUMPER_3_2-NC_TRACE_SILK]  57.66,102.35 180 bottom
JP30  PI ISO  [SMT-JUMPER_2_NC_TRACE_SILK]  19.9,111.03 90 top
JP31  JUMPER-PAD-2  [SMT-JUMPER_2_NC_TRACE_NO-SILK]  33.15,87.39 270 bottom
JP32  JUMPER-PAD-2  [SMT-JUMPER_2_NO_NO-SILK]  35.43,87.51 270 bottom
JP33  JUMPER-PAD-2  [SMT-JUMPER_2_NO_NO-SILK]  37.72,87.51 270 bottom
JP34  JUMPER-PAD-2  [SMT-JUMPER_2_NO_NO-SILK]  40,87.51 270 bottom
JP35  ADR  [SMT-JUMPER_2_NO_SILK]  41.67,101.84 270 bottom
JP36  ADR  [SMT-JUMPER_2_NO_SILK]  27.18,99.96 270 bottom
JP37  FUSE BP  [SMT-JUMPER_2_NO_SILK]  95.69,109.02 90 bottom
JP38  I2C  [SMT-JUMPER_3_2-NC_TRACE_SILK]  125.76,102.35 180 bottom
JP39  PI ISO  [SMT-JUMPER_2_NC_TRACE_SILK]  88,111.03 90 top
JP40  JUMPER-PAD-2  [SMT-JUMPER_2_NC_TRACE_NO-SILK]  101.25,87.39 270 bottom
JP41  JUMPER-PAD-2  [SMT-JUMPER_2_NO_NO-SILK]  103.53,87.51 270 bottom
JP42  JUMPER-PAD-2  [SMT-JUMPER_2_NO_NO-SILK]  105.82,87.51 270 bottom
JP43  JUMPER-PAD-2  [SMT-JUMPER_2_NO_NO-SILK]  108.1,87.51 270 bottom
JP44  ADR  [SMT-JUMPER_2_NO_SILK]  109.77,101.84 270 bottom
JP45  ADR  [SMT-JUMPER_2_NO_SILK]  95.28,99.96 270 bottom
JP46  FUSE BP  [SMT-JUMPER_2_NO_SILK]  163.79,109.02 90 bottom
JP47  I2C  [SMT-JUMPER_3_2-NC_TRACE_SILK]  193.86,102.35 180 bottom
JP48  PI ISO  [SMT-JUMPER_2_NC_TRACE_SILK]  156.1,111.03 90 top
JP49  JUMPER-PAD-2  [SMT-JUMPER_2_NC_TRACE_NO-SILK]  169.34,87.39 270 bottom
JP50  JUMPER-PAD-2  [SMT-JUMPER_2_NO_NO-SILK]  171.63,87.51 270 bottom
JP51  JUMPER-PAD-2  [SMT-JUMPER_2_NO_NO-SILK]  173.92,87.51 270 bottom
JP52  JUMPER-PAD-2  [SMT-JUMPER_2_NO_NO-SILK]  176.2,87.51 270 bottom
JP53  ADR  [SMT-JUMPER_2_NO_SILK]  177.87,101.84 270 bottom
JP54  ADR  [SMT-JUMPER_2_NO_SILK]  163.38,99.96 270 bottom
LOGO1  SFE_LOGO_NAME_FLAME.1_INCH  [SFE_LOGO_NAME_FLAME_.1]  40.39,50.67 0 bottom
LOGO2  OSHW-LOGOS  [OSHW-LOGO-S]  13.21,18.29 0 top
LOGO3  SFE_LOGO_NAME_FLAME.1_INCH  [SFE_LOGO_NAME_FLAME_.1]  108.49,50.67 0 bottom
LOGO4  SFE_LOGO_NAME_FLAME.1_INCH  [SFE_LOGO_NAME_FLAME_.1]  25,43.84 0 top
LOGO5  OSHW-LOGOS  [OSHW-LOGO-S]  81.31,18.29 0 top
LOGO6  SFE_LOGO_NAME_FLAME.1_INCH  [SFE_LOGO_NAME_FLAME_.1]  93.1,43.84 0 top
LOGO7  SFE_LOGO_NAME_FLAME.1_INCH  [SFE_LOGO_NAME_FLAME_.1]  176.58,50.67 0 bottom
LOGO8  OSHW-LOGOS  [OSHW-LOGO-S]  149.41,18.29 0 top
LOGO9  SFE_LOGO_NAME_FLAME.1_INCH  [SFE_LOGO_NAME_FLAME_.1]  161.2,43.84 0 top
LOGO10  SFE_LOGO_NAME_FLAME.1_INCH  [SFE_LOGO_NAME_FLAME_.1]  40.39,108.21 0 bottom
LOGO11  OSHW-LOGOS  [OSHW-LOGO-S]  13.21,75.83 0 top
LOGO12  SFE_LOGO_NAME_FLAME.1_INCH  [SFE_LOGO_NAME_FLAME_.1]  25,101.38 0 top
LOGO13  SFE_LOGO_NAME_FLAME.1_INCH  [SFE_LOGO_NAME_FLAME_.1]  108.49,108.21 0 bottom
LOGO14  OSHW-LOGOS  [OSHW-LOGO-S]  81.31,75.83 0 top
LOGO15  SFE_LOGO_NAME_FLAME.1_INCH  [SFE_LOGO_NAME_FLAME_.1]  93.1,101.38 0 top
LOGO16  SFE_LOGO_NAME_FLAME.1_INCH  [SFE_LOGO_NAME_FLAME_.1]  176.58,108.21 0 bottom
LOGO17  OSHW-LOGOS  [OSHW-LOGO-S]  149.41,75.83 0 top
LOGO18  SFE_LOGO_NAME_FLAME.1_INCH  [SFE_LOGO_NAME_FLAME_.1]  161.2,101.38 0 top
Q1  310mA/60V/1.6Ω  [SOT323]  57.14,40.5 180 top
Q2  310mA/60V/1.6Ω  [SOT323]  125.24,40.5 180 top
Q3  310mA/60V/1.6Ω  [SOT323]  122.38,40.52 180 top
Q4  310mA/60V/1.6Ω  [SOT323]  54.28,40.52 180 top
Q5  20V/4.2A/52mΩ/1.4W  [SOT23-3]  60.2,52.58 0 top
Q6  [SOT363_PHILIPS]  60.83,49.53 270 top
Q7  20V/4.2A/52mΩ/1.4W  [SOT23-3]  52.58,52.58 0 top
Q8  [SOT363_PHILIPS]  53.09,49.4 270 top
Q9  20V/4.2A/52mΩ/1.4W  [SOT23-3]  22.95,53.47 270 top
Q10  [SOT363_PHILIPS]  23.02,50.78 270 top
Q11  20V/4.2A/52mΩ/1.4W  [SOT23-3]  128.3,52.58 0 top
Q12  [SOT363_PHILIPS]  128.93,49.53 270 top
Q13  20V/4.2A/52mΩ/1.4W  [SOT23-3]  120.68,52.58 0 top
Q14  [SOT363_PHILIPS]  121.19,49.4 270 top
Q15  20V/4.2A/52mΩ/1.4W  [SOT23-3]  91.05,53.47 270 top
Q16  [SOT363_PHILIPS]  91.12,50.78 270 top
Q17  20V/0.2A/8MHz/1.2Ω/1Vth  [SOT-416FL]  107.72,30.61 180 top
Q18  20V/0.2A/8MHz/1.2Ω/1Vth  [SOT-416FL]  110.75,30.58 180 top
Q19  20V/0.2A/8MHz/1.2Ω/1Vth  [SOT-416FL]  107.98,41.4 0 top
Q20  20V/0.2A/8MHz/1.2Ω/1Vth  [SOT-416FL]  104.01,41.41 0 top
Q21  310mA/60V/1.6Ω  [SOT323]  193.34,40.5 180 top
Q22  310mA/60V/1.6Ω  [SOT323]  190.48,40.52 180 top
Q23  20V/0.2A/8MHz/1.2Ω/1Vth  [SOT-416FL]  39.62,30.61 180 top
Q24  20V/0.2A/8MHz/1.2Ω/1Vth  [SOT-416FL]  42.65,30.58 180 top
Q25  20V/4.2A/52mΩ/1.4W  [SOT23-3]  196.4,52.58 0 top
Q26  [SOT363_PHILIPS]  197.03,49.53 270 top
Q27  20V/0.2A/8MHz/1.2Ω/1Vth  [SOT-416FL]  39.88,41.4 0 top
Q28  20V/0.2A/8MHz/1.2Ω/1Vth  [SOT-416FL]  35.91,41.41 0 top
Q29  20V/4.2A/52mΩ/1.4W  [SOT23-3]  188.78,52.58 0 top
Q30  [SOT363_PHILIPS]  189.28,49.4 270 top
Q31  20V/4.2A/52mΩ/1.4W  [SOT23-3]  159.14,53.47 270 top
Q32  [SOT363_PHILIPS]  159.22,50.78 270 top
Q33  20V/0.2A/8MHz/1.2Ω/1Vth  [SOT-416FL]  175.82,30.61 180 top
Q34  20V/0.2A/8MHz/1.2Ω/1Vth  [SOT-416FL]  178.84,30.58 180 top
Q35  20V/0.2A/8MHz/1.2Ω/1Vth  [SOT-416FL]  176.08,41.4 0 top
Q36  20V/0.2A/8MHz/1.2Ω/1Vth  [SOT-416FL]  172.1,41.41 0 top
Q37  310mA/60V/1.6Ω  [SOT323]  57.14,98.04 180 top
Q38  310mA/60V/1.6Ω  [SOT323]  54.28,98.06 180 top
Q39  20V/4.2A/52mΩ/1.4W  [SOT23-3]  60.2,110.12 0 top
Q40  [SOT363_PHILIPS]  60.83,107.07 270 top
Q41  20V/4.2A/52mΩ/1.4W  [SOT23-3]  52.58,110.12 0 top
Q42  [SOT363_PHILIPS]  53.09,106.94 270 top
Q43  20V/4.2A/52mΩ/1.4W  [SOT23-3]  22.95,111.02 270 top
Q44  [SOT363_PHILIPS]  23.02,108.33 270 top
Q45  20V/0.2A/8MHz/1.2Ω/1Vth  [SOT-416FL]  39.62,88.15 180 top
Q46  20V/0.2A/8MHz/1.2Ω/1Vth  [SOT-416FL]  42.65,88.12 180 top
Q47  20V/0.2A/8MHz/1.2Ω/1Vth  [SOT-416FL]  39.88,98.94 0 top
Q48  20V/0.2A/8MHz/1.2Ω/1Vth  [SOT-416FL]  35.91,98.95 0 top
Q49  310mA/60V/1.6Ω  [SOT323]  125.24,98.04 180 top
Q50  310mA/60V/1.6Ω  [SOT323]  122.38,98.06 180 top
Q51  20V/4.2A/52mΩ/1.4W  [SOT23-3]  128.3,110.12 0 top
Q52  [SOT363_PHILIPS]  128.93,107.07 270 top
Q53  20V/4.2A/52mΩ/1.4W  [SOT23-3]  120.68,110.12 0 top
Q54  [SOT363_PHILIPS]  121.19,106.94 270 top
Q55  20V/4.2A/52mΩ/1.4W  [SOT23-3]  91.05,111.02 270 top
Q56  [SOT363_PHILIPS]  91.12,108.33 270 top
Q57  20V/0.2A/8MHz/1.2Ω/1Vth  [SOT-416FL]  107.72,88.15 180 top
Q58  20V/0.2A/8MHz/1.2Ω/1Vth  [SOT-416FL]  110.75,88.12 180 top
Q59  20V/0.2A/8MHz/1.2Ω/1Vth  [SOT-416FL]  107.98,98.94 0 top
Q60  20V/0.2A/8MHz/1.2Ω/1Vth  [SOT-416FL]  104.01,98.95 0 top
Q61  310mA/60V/1.6Ω  [SOT323]  193.34,98.04 180 top
Q62  310mA/60V/1.6Ω  [SOT323]  190.48,98.06 180 top
Q63  20V/4.2A/52mΩ/1.4W  [SOT23-3]  196.4,110.12 0 top
Q64  [SOT363_PHILIPS]  197.03,107.07 270 top
Q65  20V/4.2A/52mΩ/1.4W  [SOT23-3]  188.78,110.12 0 top
Q66  [SOT363_PHILIPS]  189.28,106.94 270 top
Q67  20V/4.2A/52mΩ/1.4W  [SOT23-3]  159.14,111.02 270 top
Q68  [SOT363_PHILIPS]  159.22,108.33 270 top
Q69  20V/0.2A/8MHz/1.2Ω/1Vth  [SOT-416FL]  175.82,88.15 180 top
Q70  20V/0.2A/8MHz/1.2Ω/1Vth  [SOT-416FL]  178.84,88.12 180 top
Q71  20V/0.2A/8MHz/1.2Ω/1Vth  [SOT-416FL]  176.08,98.94 0 top
Q72  20V/0.2A/8MHz/1.2Ω/1Vth  [SOT-416FL]  172.1,98.95 0 top
R1  10k  [0603@1]  51.79,38.45 270 top
R2  10k  [0603@1]  59.36,40.54 90 top
R3  5.1k  [0603@1]  41.81,29.18 0 top
R4  10k  [0603@1]  58.54,43.48 0 top
R5  10k  [0603@1]  54.58,43.41 0 top
R6  5.1k  [0603@1]  42.42,20.83 180 top
R7  47k  [0603@1]  60.86,47.37 180 top
R8  10k  [0603@1]  58.29,48.77 90 top
R9  47k  [0603@1]  53.09,47.28 180 top
R10  5.1k  [0603@1]  18.28,49.16 180 top
R11  5.1k  [0603@1]  18.26,51.04 180 top
R12  5.1k  [0603@1]  41.82,27.61 0 top
R13  10k  [0603@1]  50.67,48.64 90 top
R14  47k  [0603@1]  22.56,48.99 180 top
R15  10k  [0603@1]  25.3,51.81 270 top
R16  2.2k  [0402-TIGHT]  42.75,40.31 180 top
R17  10k  [0603@1]  119.89,38.45 270 top
R18  10k  [0603@1]  127.46,40.54 90 top
R19  10k  [0603@1]  126.64,43.48 0 top
R20  10k  [0603@1]  122.68,43.41 0 top
R21  5.1k  [0603@1]  86.38,49.16 180 top
R22  10k  [0603@1]  17.68,38.09 90 top
R23  5.1k  [0603@1]  86.36,51.04 180 top
R24  47k  [0603@1]  128.96,47.37 180 top
R25  1  [0603@1]  30.1,24.92 180 top
R26  1  [0603@1]  30.1,26.39 180 top
R27  470  [0603@1]  41.39,25.06 90 top
R28  10k  [0603@1]  126.39,48.77 90 top
R29  47k  [0603@1]  121.19,47.28 180 top
R30  10k  [0603@1]  118.77,48.64 90 top
R31  47k  [0603@1]  90.66,48.99 180 top
R32  10k  [0603@1]  93.4,51.81 270 top
R33  10k  [0603@1]  27.18,38.61 90 top
R34  1  [0603@1]  98.2,24.92 180 top
R35  1  [0603@1]  98.2,26.39 180 top
R36  470  [0603@1]  109.49,25.06 90 top
R37  10k  [0603@1]  24,19.56 270 top
R38  10k  [0603@1]  24,23.37 90 top
R39  10k  [0603@1]  22.1,19.56 270 top
R40  10k  [0603@1]  22.1,23.37 270 top
R41  10k  [0603@1]  20.19,19.56 270 top
R42  10k  [0603@1]  20.19,23.37 90 top
R43  10k  [0603@1]  18.29,19.56 90 top
R44  10k  [0603@1]  18.29,23.37 270 top
R45  2.2k  [0402-TIGHT]  39.6,32.74 0 top
R46  2.2k  [0402-TIGHT]  107.7,32.74 0 top
R47  2.2k  [0402-TIGHT]  42.62,32.74 0 top
R48  2.2k  [0402-TIGHT]  110.72,32.74 0 top
R49  2.2k  [0402-TIGHT]  107.97,39.24 180 top
R50  2.2k  [0402-TIGHT]  106.54,40.94 270 top
R51  2.2k  [0402-TIGHT]  104.01,39.25 180 top
R52  2.2k  [0402-TIGHT]  105.35,40.92 270 top
R53  2.2k  [0402-TIGHT]  39.87,39.24 180 top
R54  2.2k  [0402-TIGHT]  38.44,40.94 270 top
R55  2.2k  [0402-TIGHT]  35.91,39.25 180 top
R56  2.2k  [0402-TIGHT]  37.25,40.92 270 top
R57  10k  [0603@1]  85.78,38.09 90 top
R58  10k  [0603@1]  95.28,38.61 90 top
R59  10k  [0603@1]  92.1,19.56 270 top
R60  10k  [0603@1]  92.1,23.37 90 top
R61  10k  [0603@1]  90.2,19.56 270 top
R62  10k  [0603@1]  90.2,23.37 270 top
R63  10k  [0603@1]  88.29,19.56 270 top
R64  10k  [0603@1]  88.29,23.37 90 top
R65  10k  [0603@1]  86.39,19.56 90 top
R66  10k  [0603@1]  86.39,23.37 270 top
R67  5.1k  [0603@1]  110.52,20.83 180 top
R68  5.1k  [0603@1]  109.91,29.18 0 top
R69  5.1k  [0603@1]  109.92,27.61 0 top
R70  2.2k  [0402-TIGHT]  110.85,40.31 180 top
R71  10k  [0603@1]  187.99,38.45 270 top
R72  10k  [0603@1]  195.56,40.54 90 top
R73  10k  [0603@1]  194.74,43.48 0 top
R74  10k  [0603@1]  190.78,43.41 0 top
R75  5.1k  [0603@1]  154.48,49.16 180 top
R76  5.1k  [0603@1]  154.46,51.04 180 top
R77  47k  [0603@1]  197.05,47.37 180 top
R78  10k  [0603@1]  194.49,48.77 90 top
R79  47k  [0603@1]  189.28,47.28 180 top
R80  10k  [0603@1]  186.87,48.64 90 top
R81  47k  [0603@1]  158.76,48.99 180 top
R82  10k  [0603@1]  161.5,51.81 270 top
R83  1  [0603@1]  166.3,24.92 180 top
R84  1  [0603@1]  166.3,26.39 180 top
R85  470  [0603@1]  177.59,25.06 90 top
R86  2.2k  [0402-TIGHT]  175.8,32.74 0 top
R87  2.2k  [0402-TIGHT]  178.82,32.74 0 top
R88  2.2k  [0402-TIGHT]  176.07,39.24 180 top
R89  2.2k  [0402-TIGHT]  174.64,40.94 270 top
R90  2.2k  [0402-TIGHT]  172.1,39.25 180 top
R91  2.2k  [0402-TIGHT]  173.45,40.92 270 top
R92  10k  [0603@1]  153.88,38.09 90 top
R93  10k  [0603@1]  163.38,38.61 90 top
R94  10k  [0603@1]  160.2,19.56 270 top
R95  10k  [0603@1]  160.2,23.37 90 top
R96  10k  [0603@1]  158.3,19.56 270 top
R97  10k  [0603@1]  158.3,23.37 270 top
R98  10k  [0603@1]  156.39,19.56 270 top
R99  10k  [0603@1]  156.39,23.37 90 top
R100  10k  [0603@1]  154.49,19.56 90 top
R101  10k  [0603@1]  154.49,23.37 270 top
R102  5.1k  [0603@1]  178.62,20.83 180 top
R103  5.1k  [0603@1]  178,29.18 0 top
R104  5.1k  [0603@1]  178.02,27.61 0 top
R105  2.2k  [0402-TIGHT]  178.95,40.31 180 top
R106  10k  [0603@1]  51.79,95.99 270 top
R107  10k  [0603@1]  59.36,98.08 90 top
R108  10k  [0603@1]  58.54,101.02 0 top
R109  10k  [0603@1]  54.58,100.95 0 top
R110  5.1k  [0603@1]  18.28,106.7 180 top
R111  5.1k  [0603@1]  18.26,108.58 180 top
R112  47k  [0603@1]  60.86,104.91 180 top
R113  10k  [0603@1]  58.29,106.31 90 top
R114  47k  [0603@1]  53.09,104.82 180 top
R115  10k  [0603@1]  50.67,106.18 90 top
R116  47k  [0603@1]  22.56,106.53 180 top
R117  10k  [0603@1]  25.3,109.35 270 top
R118  1  [0603@1]  30.1,82.46 180 top
R119  1  [0603@1]  30.1,83.93 180 top
R120  470  [0603@1]  41.39,82.61 90 top
R121  2.2k  [0402-TIGHT]  39.6,90.28 0 top
R122  2.2k  [0402-TIGHT]  42.62,90.28 0 top
R123  2.2k  [0402-TIGHT]  39.87,96.78 180 top
R124  2.2k  [0402-TIGHT]  38.44,98.49 270 top
R125  2.2k  [0402-TIGHT]  35.91,96.79 180 top
R126  2.2k  [0402-TIGHT]  37.25,98.47 270 top
R127  10k  [0603@1]  17.68,95.63 90 top
R128  10k  [0603@1]  27.18,96.15 90 top
R129  10k  [0603@1]  24,77.1 270 top
R130  10k  [0603@1]  24,80.91 90 top
R131  10k  [0603@1]  22.1,77.1 270 top
R132  10k  [0603@1]  22.1,80.91 270 top
R133  10k  [0603@1]  20.19,77.1 270 top
R134  10k  [0603@1]  20.19,80.91 90 top
R135  10k  [0603@1]  18.29,77.1 90 top
R136  10k  [0603@1]  18.29,80.91 270 top
R137  5.1k  [0603@1]  42.42,78.37 180 top
R138  5.1k  [0603@1]  41.81,86.72 0 top
R139  5.1k  [0603@1]  41.82,85.15 0 top
R140  2.2k  [0402-TIGHT]  42.75,97.85 180 top
R141  10k  [0603@1]  119.89,95.99 270 top
R142  10k  [0603@1]  127.46,98.08 90 top
R143  10k  [0603@1]  126.64,101.02 0 top
R144  10k  [0603@1]  122.68,100.95 0 top
R145  5.1k  [0603@1]  86.38,106.7 180 top
R146  5.1k  [0603@1]  86.36,108.58 180 top
R147  47k  [0603@1]  128.96,104.91 180 top
R148  10k  [0603@1]  126.39,106.31 90 top
R149  47k  [0603@1]  121.19,104.82 180 top
R150  10k  [0603@1]  118.77,106.18 90 top
R151  47k  [0603@1]  90.66,106.53 180 top
R152  10k  [0603@1]  93.4,109.35 270 top
R153  1  [0603@1]  98.2,82.46 180 top
R154  1  [0603@1]  98.2,83.93 180 top
R155  470  [0603@1]  109.49,82.61 90 top
R156  2.2k  [0402-TIGHT]  107.7,90.28 0 top
R157  2.2k  [0402-TIGHT]  110.72,90.28 0 top
R158  2.2k  [0402-TIGHT]  107.97,96.78 180 top
R159  2.2k  [0402-TIGHT]  106.54,98.49 270 top
R160  2.2k  [0402-TIGHT]  104.01,96.79 180 top
R161  2.2k  [0402-TIGHT]  105.35,98.47 270 top
R162  10k  [0603@1]  85.78,95.63 90 top
R163  10k  [0603@1]  95.28,96.15 90 top
R164  10k  [0603@1]  92.1,77.1 270 top
R165  10k  [0603@1]  92.1,80.91 90 top
R166  10k  [0603@1]  90.2,77.1 270 top
R167  10k  [0603@1]  90.2,80.91 270 top
R168  10k  [0603@1]  88.29,77.1 270 top
R169  10k  [0603@1]  88.29,80.91 90 top
R170  10k  [0603@1]  86.39,77.1 90 top
R171  10k  [0603@1]  86.39,80.91 270 top
R172  5.1k  [0603@1]  110.52,78.37 180 top
R173  5.1k  [0603@1]  109.91,86.72 0 top
R174  5.1k  [0603@1]  109.92,85.15 0 top
R175  2.2k  [0402-TIGHT]  110.85,97.85 180 top
R176  10k  [0603@1]  187.99,95.99 270 top
R177  10k  [0603@1]  195.56,98.08 90 top
R178  10k  [0603@1]  194.74,101.02 0 top
R179  10k  [0603@1]  190.78,100.95 0 top
R180  5.1k  [0603@1]  154.48,106.7 180 top
R181  5.1k  [0603@1]  154.46,108.58 180 top
R182  47k  [0603@1]  197.05,104.91 180 top
R183  10k  [0603@1]  194.49,106.31 90 top
R184  47k  [0603@1]  189.28,104.82 180 top
R185  10k  [0603@1]  186.87,106.18 90 top
R186  47k  [0603@1]  158.76,106.53 180 top
R187  10k  [0603@1]  161.5,109.35 270 top
R188  1  [0603@1]  166.3,82.46 180 top
R189  1  [0603@1]  166.3,83.93 180 top
R190  470  [0603@1]  177.59,82.61 90 top
R191  2.2k  [0402-TIGHT]  175.8,90.28 0 top
R192  2.2k  [0402-TIGHT]  178.82,90.28 0 top
R193  2.2k  [0402-TIGHT]  176.07,96.78 180 top
R194  2.2k  [0402-TIGHT]  174.64,98.49 270 top
R195  2.2k  [0402-TIGHT]  172.1,96.79 180 top
R196  2.2k  [0402-TIGHT]  173.45,98.47 270 top
R197  10k  [0603@1]  153.88,95.63 90 top
R198  10k  [0603@1]  163.38,96.15 90 top
R199  10k  [0603@1]  160.2,77.1 270 top
R200  10k  [0603@1]  160.2,80.91 90 top
R201  10k  [0603@1]  158.3,77.1 270 top
R202  10k  [0603@1]  158.3,80.91 270 top
R203  10k  [0603@1]  156.39,77.1 270 top
R204  10k  [0603@1]  156.39,80.91 90 top
R205  10k  [0603@1]  154.49,77.1 90 top
R206  10k  [0603@1]  154.49,80.91 270 top
R207  5.1k  [0603@1]  178.62,78.37 180 top
R208  5.1k  [0603@1]  178,86.72 0 top
R209  5.1k  [0603@1]  178.02,85.15 0 top
R210  2.2k  [0402-TIGHT]  178.95,97.85 180 top
TP0  [PAD.03X.04]  57.66,27.18 270 bottom
TP1  [PAD.03X.04]  60.2,27.18 270 bottom
TP2  [PAD.03X.04]  62.74,27.18 270 bottom
TP3  [PAD.03X.04]  65.28,27.18 270 bottom
TP4  [TP_15TH]  70.28,18.34 270 top
TP5  [TP_15TH]  70.36,15.75 270 top
TP6  [PAD.03X.04]  18.29,51.31 0 bottom
TP7  [PAD.03X.04]  50.04,23.37 180 bottom
TP8  [PAD.03X.04]  47.5,23.37 180 bottom
TP9  TEST-POINT3X4  [PAD.03X.04]  36.07,39.88 0 bottom
TP10  [PAD.03X.04]  36.07,46.23 0 bottom
TP11  [PAD.03X.04]  46.23,13.21 180 bottom
TP12  [PAD.03X.04]  43.69,13.21 180 bottom
TP13  [PAD.03X.04]  38.61,13.21 90 bottom
TP14  [PAD.03X.04]  36.07,13.21 90 bottom
TP15  [PAD.03X.04]  33.53,13.21 90 bottom
TP16  [PAD.03X.04]  30.99,13.21 90 bottom
TP17  [PAD.03X.04]  24.64,13.21 0 bottom
TP18  [PAD.03X.04]  22.1,13.21 0 bottom
TP19  [TP_15TH]  32.26,46.23 0 bottom
TP20  [PAD.03X.04]  125.76,27.18 270 bottom
TP21  [PAD.03X.04]  128.3,27.18 270 bottom
TP22  [PAD.03X.04]  130.84,27.18 270 bottom
TP23  [PAD.03X.04]  133.38,27.18 270 bottom
TP24  [TP_15TH]  138.38,18.34 270 top
TP25  [TP_15TH]  138.46,15.75 270 top
TP26  [PAD.03X.04]  86.39,51.31 0 bottom
TP27  [PAD.03X.04]  118.14,23.37 180 bottom
TP28  [PAD.03X.04]  115.6,23.37 180 bottom
TP29  TEST-POINT3X4  [PAD.03X.04]  104.17,39.88 0 bottom
TP30  [PAD.03X.04]  104.17,46.23 0 bottom
TP31  [PAD.03X.04]  114.33,13.21 180 bottom
TP32  [PAD.03X.04]  111.79,13.21 180 bottom
TP33  [PAD.03X.04]  106.71,13.21 90 bottom
TP34  [PAD.03X.04]  104.17,13.21 90 bottom
TP35  [PAD.03X.04]  101.63,13.21 90 bottom
TP36  [PAD.03X.04]  99.09,13.21 90 bottom
TP37  [PAD.03X.04]  92.74,13.21 0 bottom
TP38  [PAD.03X.04]  90.2,13.21 0 bottom
TP39  [TP_15TH]  100.36,46.23 0 bottom
TP40  [PAD.03X.04]  193.86,27.18 270 bottom
TP41  [PAD.03X.04]  196.4,27.18 270 bottom
TP42  [PAD.03X.04]  198.94,27.18 270 bottom
TP43  [PAD.03X.04]  201.48,27.18 270 bottom
TP44  [TP_15TH]  206.48,18.34 270 top
TP45  [TP_15TH]  206.56,15.75 270 top
TP46  [PAD.03X.04]  154.49,51.31 0 bottom
TP47  [PAD.03X.04]  186.24,23.37 180 bottom
TP48  [PAD.03X.04]  183.7,23.37 180 bottom
TP49  TEST-POINT3X4  [PAD.03X.04]  172.27,39.88 0 bottom
TP50  [PAD.03X.04]  172.27,46.23 0 bottom
TP51  [PAD.03X.04]  182.43,13.21 180 bottom
TP52  [PAD.03X.04]  179.89,13.21 180 bottom
TP53  [PAD.03X.04]  174.81,13.21 90 bottom
TP54  [PAD.03X.04]  172.27,13.21 90 bottom
TP55  [PAD.03X.04]  169.73,13.21 90 bottom
TP56  [PAD.03X.04]  167.19,13.21 90 bottom
TP57  [PAD.03X.04]  160.84,13.21 0 bottom
TP58  [PAD.03X.04]  158.3,13.21 0 bottom
TP59  [TP_15TH]  168.46,46.23 0 bottom
TP60  [PAD.03X.04]  57.66,84.72 270 bottom
TP61  [PAD.03X.04]  60.2,84.72 270 bottom
TP62  [PAD.03X.04]  62.74,84.72 270 bottom
TP63  [PAD.03X.04]  65.28,84.72 270 bottom
TP64  [TP_15TH]  70.28,75.88 270 top
TP65  [TP_15TH]  70.36,73.29 270 top
TP66  [PAD.03X.04]  18.29,108.85 0 bottom
TP67  [PAD.03X.04]  50.04,80.91 180 bottom
TP68  [PAD.03X.04]  47.5,80.91 180 bottom
TP69  TEST-POINT3X4  [PAD.03X.04]  36.07,97.42 0 bottom
TP70  [PAD.03X.04]  36.07,103.77 0 bottom
TP71  [PAD.03X.04]  46.23,70.75 180 bottom
TP72  [PAD.03X.04]  43.69,70.75 180 bottom
TP73  [PAD.03X.04]  38.61,70.75 90 bottom
TP74  [PAD.03X.04]  36.07,70.75 90 bottom
TP75  [PAD.03X.04]  33.53,70.75 90 bottom
TP76  [PAD.03X.04]  30.99,70.75 90 bottom
TP77  [PAD.03X.04]  24.64,70.75 0 bottom
TP78  [PAD.03X.04]  22.1,70.75 0 bottom
TP79  [TP_15TH]  32.26,103.77 0 bottom
TP80  [PAD.03X.04]  125.76,84.72 270 bottom
TP81  [PAD.03X.04]  128.3,84.72 270 bottom
TP82  [PAD.03X.04]  130.84,84.72 270 bottom
TP83  [PAD.03X.04]  133.38,84.72 270 bottom
TP84  [TP_15TH]  138.38,75.88 270 top
TP85  [TP_15TH]  138.46,73.29 270 top
TP86  [PAD.03X.04]  86.39,108.85 0 bottom
TP87  [PAD.03X.04]  118.14,80.91 180 bottom
TP88  [PAD.03X.04]  115.6,80.91 180 bottom
TP89  TEST-POINT3X4  [PAD.03X.04]  104.17,97.42 0 bottom
TP90  [PAD.03X.04]  104.17,103.77 0 bottom
TP91  [PAD.03X.04]  114.33,70.75 180 bottom
TP92  [PAD.03X.04]  111.79,70.75 180 bottom
TP93  [PAD.03X.04]  106.71,70.75 90 bottom
TP94  [PAD.03X.04]  104.17,70.75 90 bottom
TP95  [PAD.03X.04]  101.63,70.75 90 bottom
TP96  [PAD.03X.04]  99.09,70.75 90 bottom
TP97  [PAD.03X.04]  92.74,70.75 0 bottom
TP98  [PAD.03X.04]  90.2,70.75 0 bottom
TP99  [TP_15TH]  100.36,103.77 0 bottom
TP100  [PAD.03X.04]  193.86,84.72 270 bottom
TP101  [PAD.03X.04]  196.4,84.72 270 bottom
TP102  [PAD.03X.04]  198.94,84.72 270 bottom
TP103  [PAD.03X.04]  201.48,84.72 270 bottom
TP104  [TP_15TH]  206.48,75.88 270 top
TP105  [TP_15TH]  206.56,73.29 270 top
TP106  [PAD.03X.04]  154.49,108.85 0 bottom
TP107  [PAD.03X.04]  186.24,80.91 180 bottom
TP108  [PAD.03X.04]  183.7,80.91 180 bottom
TP109  TEST-POINT3X4  [PAD.03X.04]  172.27,97.42 0 bottom
TP110  [PAD.03X.04]  172.27,103.77 0 bottom
TP111  [PAD.03X.04]  182.43,70.75 180 bottom
TP112  [PAD.03X.04]  179.89,70.75 180 bottom
TP113  [PAD.03X.04]  174.81,70.75 90 bottom
TP114  [PAD.03X.04]  172.27,70.75 90 bottom
TP115  [PAD.03X.04]  169.73,70.75 90 bottom
TP116  [PAD.03X.04]  167.19,70.75 90 bottom
TP117  [PAD.03X.04]  160.84,70.75 0 bottom
TP118  [PAD.03X.04]  158.3,70.75 0 bottom
TP119  [TP_15TH]  168.46,103.77 0 bottom
U1  PCA9685  [TSSOP-28_4MM]  57.86,34.28 90 top
U2  PCA9685  [TSSOP-28_4MM]  125.96,34.28 90 top
U3  DRV8835  [WSON-12]  102.9,18.54 0 top
U4  ATTINY84-ARDUINO  [SO14]  22.1,36.07 270 top
U5  DRV8835  [WSON-12]  34.8,18.54 0 top
U6  CY8C4245LQI-483  [QFN-40]  36.3,23.75 0 top
U7  9DoF IMU  [QFN24-3X3]  41.15,36.07 180 top
U8  1.8V/100mA  [SC70]  36.26,35.14 0 top
U9  CY8C4245LQI-483  [QFN-40]  104.4,23.75 0 top
U10  9DoF IMU  [QFN24-3X3]  109.25,36.07 180 top
U11  1.8V/100mA  [SC70]  104.36,35.14 0 top
U12  ATTINY84-ARDUINO  [SO14]  90.2,36.07 270 top
U13  PCA9685  [TSSOP-28_4MM]  194.06,34.28 90 top
U14  DRV8835  [WSON-12]  171,18.54 0 top
U15  CY8C4245LQI-483  [QFN-40]  172.49,23.75 0 top
U16  9DoF IMU  [QFN24-3X3]  177.35,36.07 180 top
U17  1.8V/100mA  [SC70]  172.46,35.14 0 top
U18  ATTINY84-ARDUINO  [SO14]  158.3,36.07 270 top
U19  PCA9685  [TSSOP-28_4MM]  57.86,91.82 90 top
U20  DRV8835  [WSON-12]  34.8,76.08 0 top
U21  CY8C4245LQI-483  [QFN-40]  36.3,81.29 0 top
U22  9DoF IMU  [QFN24-3X3]  41.15,93.61 180 top
U23  1.8V/100mA  [SC70]  36.26,92.68 0 top
U24  ATTINY84-ARDUINO  [SO14]  22.1,93.61 270 top
U25  PCA9685  [TSSOP-28_4MM]  125.96,91.82 90 top
U26  DRV8835  [WSON-12]  102.9,76.08 0 top
U27  CY8C4245LQI-483  [QFN-40]  104.4,81.29 0 top
U28  9DoF IMU  [QFN24-3X3]  109.25,93.61 180 top
U29  1.8V/100mA  [SC70]  104.36,92.68 0 top
U30  ATTINY84-ARDUINO  [SO14]  90.2,93.61 270 top
U31  PCA9685  [TSSOP-28_4MM]  194.06,91.82 90 top
U32  DRV8835  [WSON-12]  171,76.08 0 top
U33  CY8C4245LQI-483  [QFN-40]  172.49,81.29 0 top
U34  9DoF IMU  [QFN24-3X3]  177.35,93.61 180 top
U35  1.8V/100mA  [SC70]  172.46,92.68 0 top
U36  ATTINY84-ARDUINO  [SO14]  158.3,93.61 270 top
U$1  QWIIC_LOGO_5MM  [QWIIC_5MM]  71.41,21.44 0 top
U$2  [I_SUPER2_C-()-03]  59.08,46.45 0 bottom
U$3  [GND3]  67.44,52.55 0 top
U$4  [GND3]  67.41,47.4 0 top
U$5  [GND3]  67.46,42.34 0 top
U$6  [10]  28.29,14.15 0 top
U$7  [10]  35.93,14.19 0 top
U$8  [00]  56.25,25.59 0 top
U$9  [#MTR_RST5]  65.53,34.67 0 top
U$10  [#FSYNC7]  66.8,32.26 0 top
U$11  [#ENC_RST4]  65.66,37.34 0 top
U$12  [#ENC_INT6]  65.91,39.88 0 top
U$13  [EXT_PWR_INPUTS3]  64.39,41.71 90 top
U$14  [5V2]  68.45,55.12 0 top
U$15  [MTR1]  67.18,49.99 0 top
U$16  [SERVO0]  65.71,44.88 0 top
U$17  [11]  58.81,25.53 0 top
U$18  [#16]  40.79,14.22 0 top
U$19  [#16]  25.58,14.25 0 top
U$20  [B15]  20.42,14.12 0 top
U$21  [B15]  45.92,14.12 0 top
U$22  [ENC112]  20.34,16.02 0 top
U$23  [ENC213]  43.13,15.93 0 top
U$24  [22]  61.2,25.51 0 top
U$25  [33]  63.73,25.49 0 top
U$26  [A14]  22.81,14.17 0 top
U$27  [A14]  43.08,14.15 0 top
U$28  [_17]  17.73,14.81 0 top
U$29  [STAT4]  34.55,9.6 90 top
U$30  [_17]  48.26,14.78 0 top
U$31  [MTRA0]  27.82,16.02 0 top
U$32  [ISO1]  16.25,52.91 0 top
U$33  [05]  41.4,31.56 0 bottom
U$34  [16]  39.28,31.53 0 bottom
U$35  [PI0]  16.72,53.96 0 top